# Altium PCB PedalBoxREV2.PcbDoc (part 1 of 2)
Units mm, origin at the board's own origin, x right, y up, seen from the top; angles counter-clockwise.
Board outline 89.6 x 44.45 mm, 2 copper layers (Top Layer, Bottom Layer); 115 components, 87 nets, 418 pads, 92 vias.
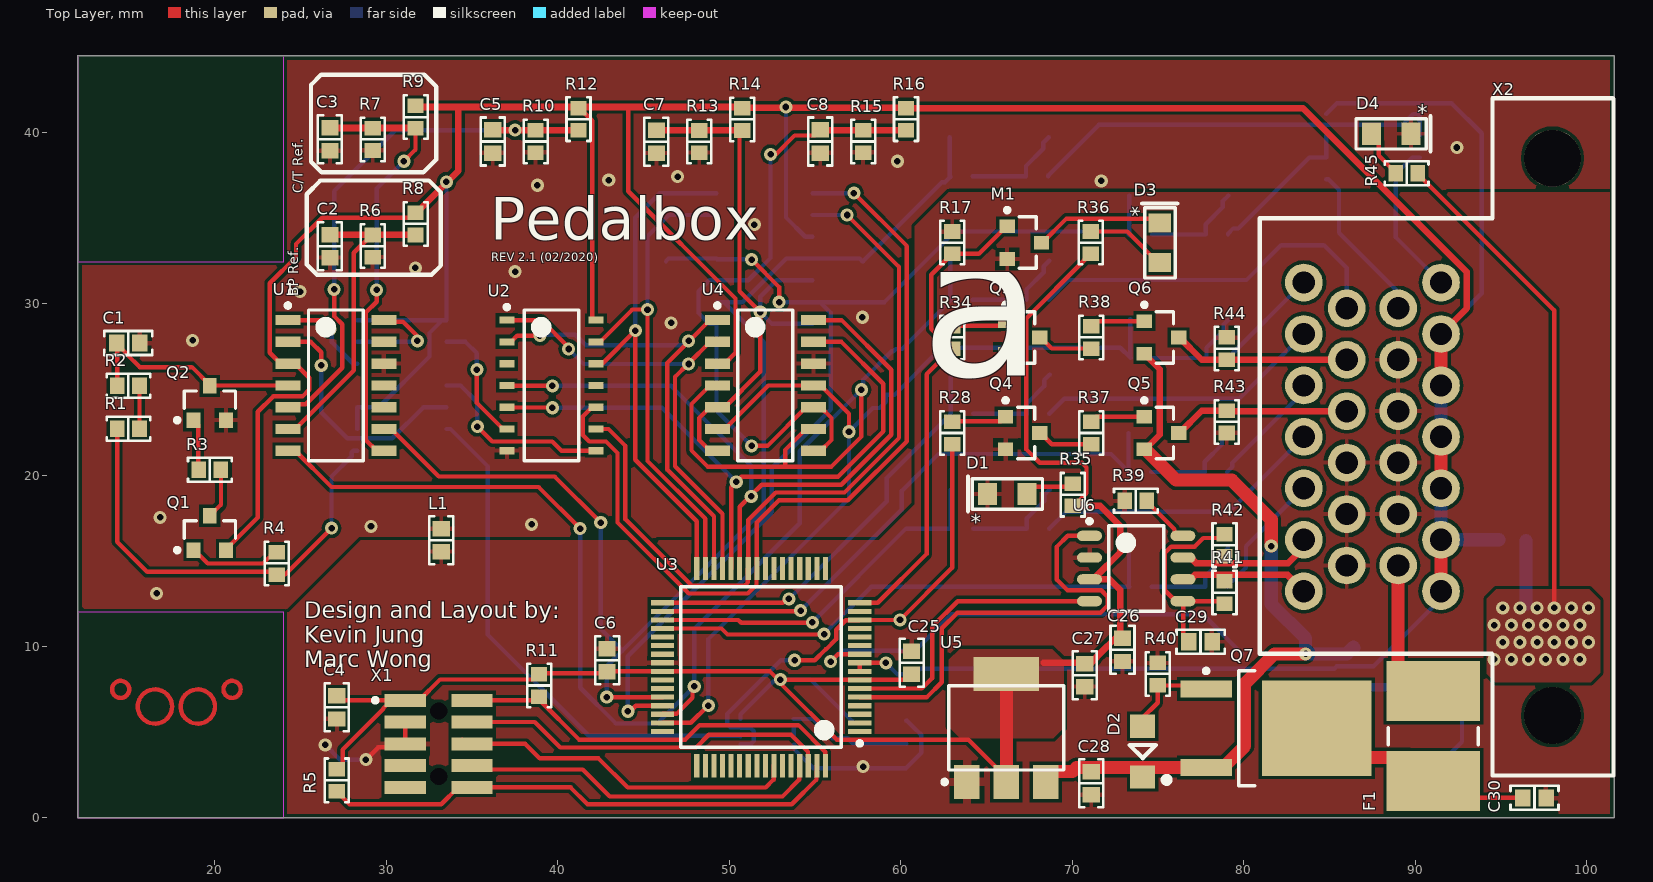
[diagram p0: Top Layer view]
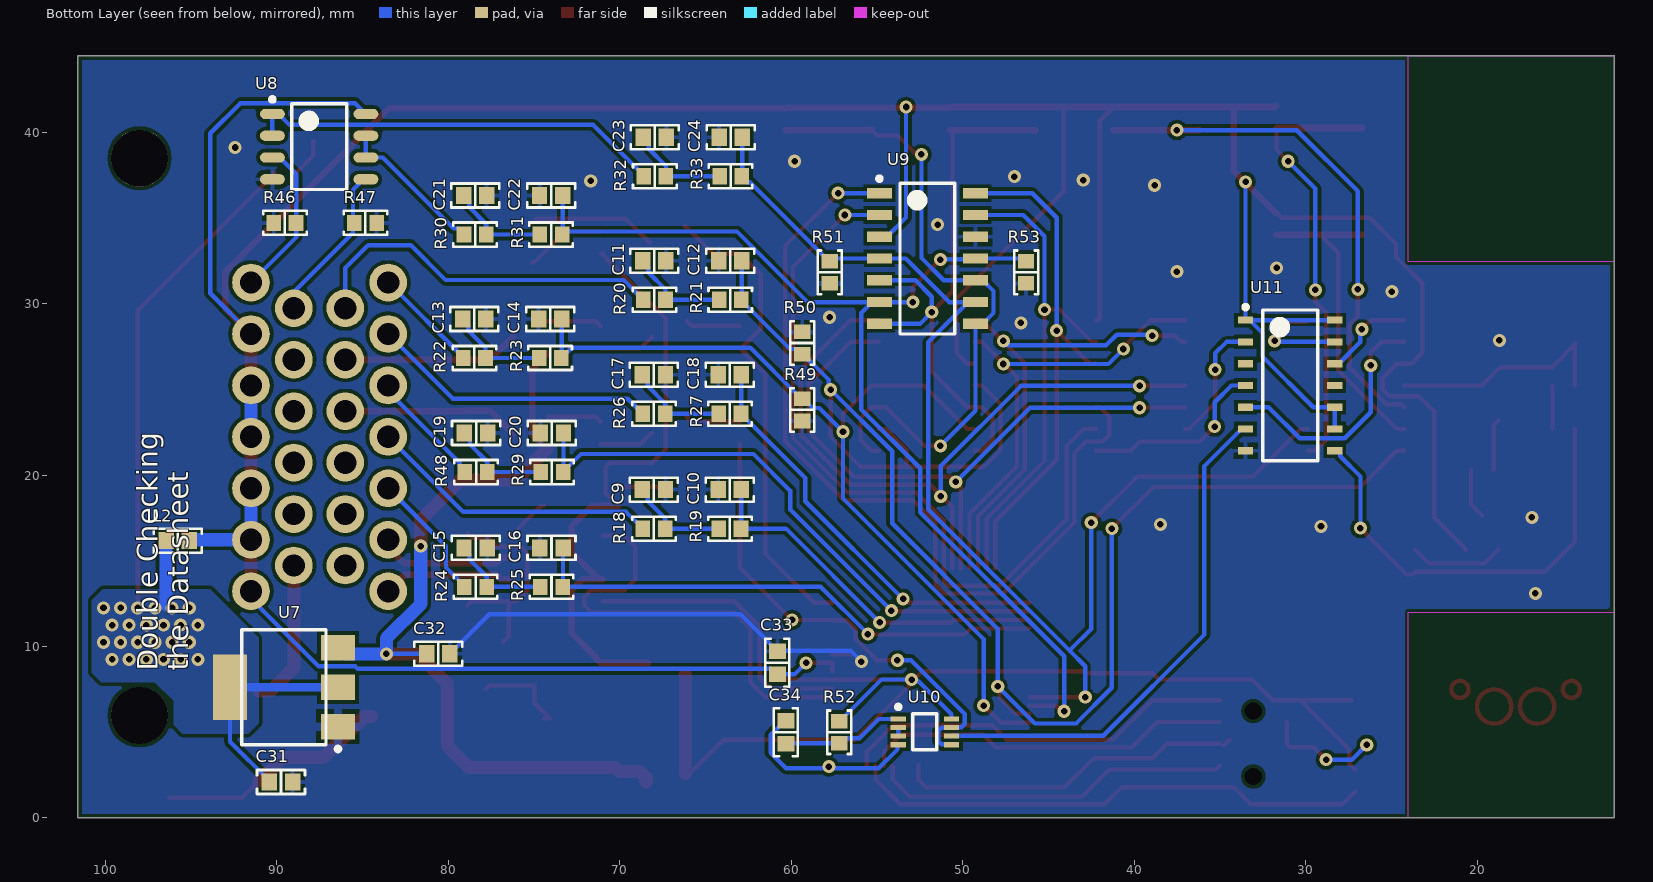
[diagram p1: Bottom Layer view, seen from below]
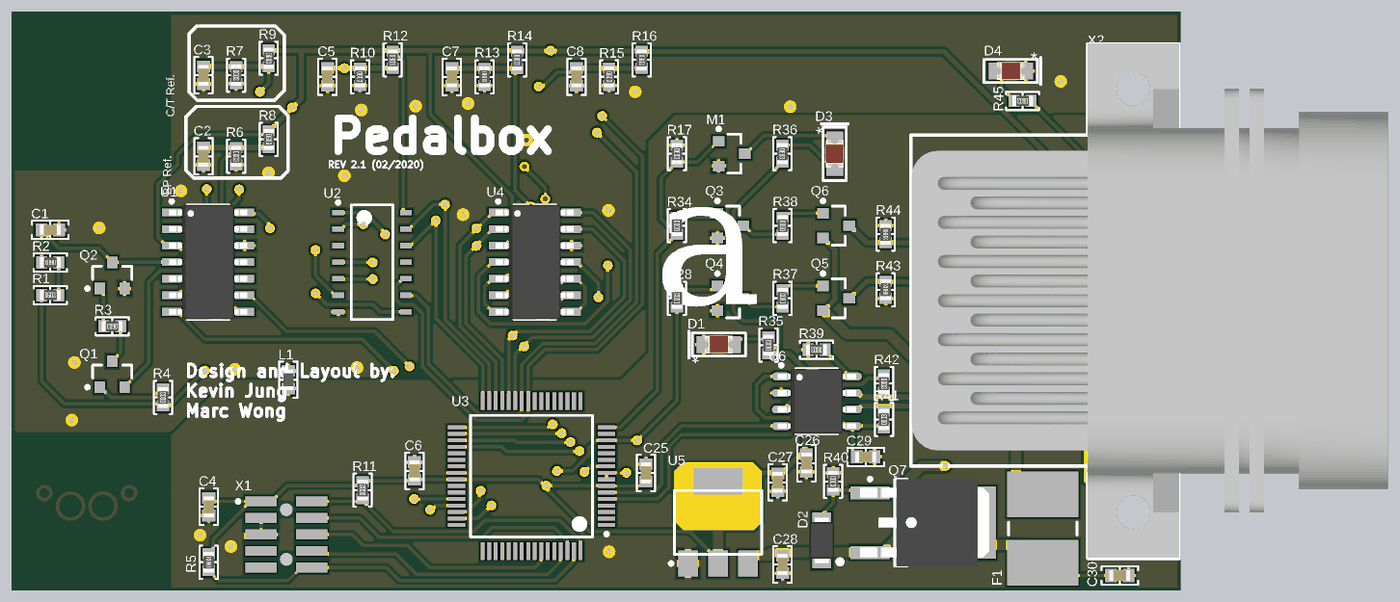
[diagram p2: 3D render of the assembled board from above, using the file's embedded part models]
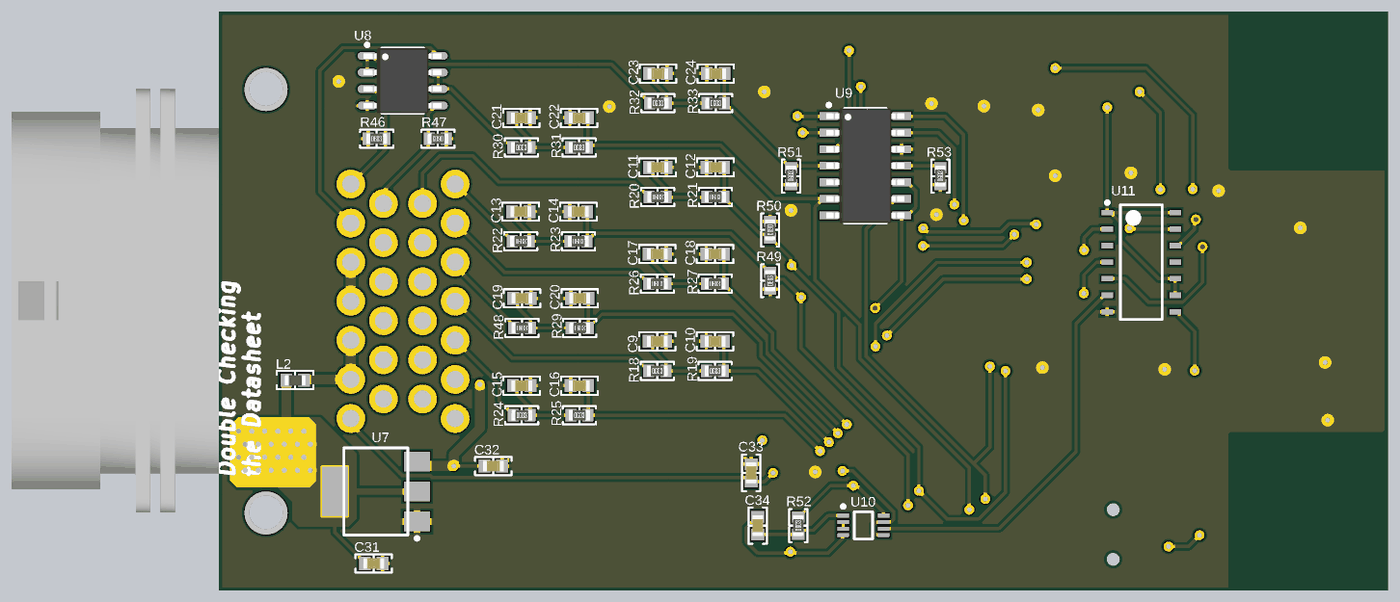
[diagram p3: 3D render of the assembled board from below, using the file's embedded part models]

## Layer stack, top to bottom
Top Solder: solder mask 0.0102, Solder Resist, Dk 3.5
Top Layer: signal copper 0.0356
Dielectric 1: dielectric 0.32, FR-4, Dk 4.8
Bottom Layer: signal copper 0.0356
Bottom Solder: solder mask 0.0102, Solder Resist, Dk 3.5

## Board outline
12,0 12,11.999 12,12 12,44.45 24,44.45 101.601,44.45 101.601,0

## Design rules (kind name [scope] priority, off if disabled: settings)
BoardOutlineClearance [All] p1: gap=0.254 ignorepadtopadclearanceinfootprint=FALSE except(0: Arc-SplitContinuation Track-SplitContinuation SMDPad-SplitContinuation THPad-SplitContinuation Via-SplitContinuation Fill-SplitContinuation Poly-SplitContinuation Region-SplitContinuation Text-SplitContinuation)
Clearance [All] p1: gap=0.203 ignorepadtopadclearanceinfootprint=FALSE except(0.152: SMDPad-SMDPad)
DiffPairsRouting [All] p1: maxlimit=0.254 minlimit=0.254 mostfreqgap=0.254 toplayer_minwidth=0.381 toplayer_maxwidth=0.381 toplayer_prefwidth=0.381 bottomlayer_minwidth=0.381 bottomlayer_maxwidth=0.381 bottomlayer_prefwidth=0.381 maxuncoupledlength=12.7
Height [All] p1: minheight=0 maxheight=38.1 prefheight=12.7
HoleSize [All] p1 off: absolutevalues=TRUE maxlimit=2.54 minlimit=0.025 maxpercent=80.000 minpercent=20.000
MinimumAnnularRing [All] p1: minimumring=0.152
MinimumSolderMaskSliver [All] p1: minsoldermaskwidth=0.1
PlaneConnect [All] p1: pad.planeconnectstyle=Relief pad.reliefexpansion=0.508 pad.reliefentries=4 pad.reliefconductorwidth=0.254 pad.reliefairgap=0.254 via.planeconnectstyle=Direct via.reliefexpansion=0.508 via.reliefentries=4 via.reliefconductorwidth=0.254 via.reliefairgap=0.254
PolygonConnect [All] p1: thpad.connectstyle=Relief thpad.reliefconductorwidth=0.254 thpad.reliefentries=4 thpad.polygonreliefangle="90 Angle" thpad.airgapwidth=0.254 smdpad.connectstyle=Relief smdpad.reliefconductorwidth=0.254 smdpad.reliefentries=4 smdpad.polygonreliefangle="90 Angle" smdpad.airgapwidth=0.254 via.connectstyle=Direct via.reliefconductorwidth=0.254 via.reliefentries=4 via.polygonreliefangle="90 Angle" via.airgapwidth=0.254
RoomDefinition RoomDefinition_4 [InComponentClass('Room Definition 5') vs False] p1: confinementstyle=ConfineIn formatcopy=TRUE lockcomponents=FALSE outline 25.6,31.55 32.8,31.55 32.8,36.35 25.6,36.35
RoomDefinition RoomDefinition_3 [InComponentClass('Room Definition 4') vs False] p2: confinementstyle=ConfineIn formatcopy=TRUE lockcomponents=FALSE outline 35.1,37.65 42.3,37.65 42.3,42.45 35.1,42.45
RoomDefinition RoomDefinition_2 [InComponentClass('Room Definition 3') vs False] p3: confinementstyle=ConfineIn formatcopy=TRUE lockcomponents=FALSE outline 44.7,37.65 51.8,37.65 51.8,42.45 44.7,42.45
RoomDefinition RoomDefinition_1 [InComponentClass('Room Definition 2') vs False] p4: confinementstyle=ConfineIn formatcopy=TRUE lockcomponents=FALSE outline 25.6,37.775 32.8,37.775 32.8,42.575 25.6,42.575
RoomDefinition [InComponentClass('Room Definition 1') vs False] p5: confinementstyle=ConfineIn formatcopy=TRUE lockcomponents=FALSE outline 54.2,37.65 61.4,37.65 61.4,42.45 54.2,42.45
RoomDefinition U_PassiveFilter1 [InComponentClass('U_PassiveFilter1')] p6: confinementstyle=ConfineIn formatcopy=TRUE lockcomponents=FALSE outline 70.425,15.925 61.975,15.925 61.975,20.025 70.425,20.025
RoomDefinition U_PassiveFilter7 [InComponentClass('U_PassiveFilter7')] p7: confinementstyle=ConfineIn formatcopy=TRUE lockcomponents=FALSE outline 80.85,33.075 72.4,33.075 72.4,37.175 80.85,37.175
RoomDefinition U_PassiveFilter5 [InComponentClass('U_PassiveFilter5')] p8: confinementstyle=ConfineIn formatcopy=TRUE lockcomponents=FALSE outline 70.425,22.625 61.975,22.625 61.975,26.725 70.425,26.725
RoomDefinition U_PassiveFilter3 [InComponentClass('U_PassiveFilter3')] p9: confinementstyle=ConfineIn formatcopy=TRUE lockcomponents=FALSE outline 80.9,25.875 72.45,25.875 72.45,29.975 80.9,29.975
RoomDefinition U_PassiveFilter2 [InComponentClass('U_PassiveFilter2')] p10: confinementstyle=ConfineIn formatcopy=TRUE lockcomponents=FALSE outline 70.4,29.275 61.95,29.275 61.95,33.375 70.4,33.375
RoomDefinition U_PassiveFilter8 [InComponentClass('U_PassiveFilter8')] p11: confinementstyle=ConfineIn formatcopy=TRUE lockcomponents=FALSE outline 70.375,36.475 61.925,36.475 61.925,40.575 70.375,40.575
RoomDefinition U_PassiveFilter6 [InComponentClass('U_PassiveFilter6')] p12: confinementstyle=ConfineIn formatcopy=TRUE lockcomponents=FALSE outline 80.8,19.225 72.35,19.225 72.35,23.325 80.8,23.325
RoomDefinition U_PassiveFilter4 [InComponentClass('U_PassiveFilter4')] p13: confinementstyle=ConfineIn formatcopy=TRUE lockcomponents=FALSE outline 80.825,12.525 72.375,12.525 72.375,16.625 80.825,16.625
RoutingVias [All] p1: holewidth=0.381 width=0.762 viastyle="Through Hole" minholewidth=0.381 minwidth=0.762 maxholewidth=0.381 maxwidth=0.762
SilkToSilkClearance [All] p1 off: silktosilkclearance=0.254
SilkToSolderMaskClearance [IsPad] p1 off: minsilkscreentomaskgap=0.254 clearancetoexposedcopper=TRUE
SolderMaskExpansion [All] p1: expansion=0.102 istentingtop=FALSE
UnRoutedNet [All] p1: checkbadconnections=TRUE
Width [All] p1: maxlimit=0.762 minlimit=0.203 preferedwidth=0.254 minimp=50.000000 maximp=50.000000 favimp=50.000000
22 further rules are at their usual default settings.

## Classes and differential pairs
component class AnalogBuffer: R46 R47 U8
component class U_LowLatch: C34 R52 U10
component class U_PassiveFilter2: C11 C12 R20 R21
component class U_PassiveFilter3: C13 C14 R22 R23
component class Pedalbox: D1 F1 L1 L2 R45
channel class SensorCheck: "Brake Pedal Check" "Current/Throttle Check"
channel class PassiveFilter: U_PassiveFilter1 U_PassiveFilter2 U_PassiveFilter3 U_PassiveFilter4 U_PassiveFilter5 U_PassiveFilter6 U_PassiveFilter7 U_PassiveFilter8
channel class 12V_to_5V_LDO_1A: 5V_LDO_Analog 5V_LDO_Digital
component class U_PassiveFilter8: C23 C24 R32 R33
component class U_PassiveFilter7: C21 C22 R30 R31
component class U_PassiveFilter6: C19 C20 R14 R29
component class U_PassiveFilter5: C17 C18 R26 R27
component class U_PassiveFilter4: C15 C16 R24 R25
component class U_PassiveFilter1: C9 C10 R18 R19
component class RVPOVP: C30 D1 Q7 R53
component class MCUPedalbox: C4 C6 C28 C30 D1 M1 R6 R17 R36 R41 U3 X2
component class "Current/Throttle Check": R52 R53 U3
component class CAN_5V: C3 C26 R36 R41 R52 U6
component class BSPD: C1 Q1 Q6 R2 R4 R28 R37 U8
component class "Brake Pedal Check": R7 R50 U6
component class VoltageReferenceGen: C3 C5 C7 C8 C26 R2 R4 R6 R7 R12 R13 R14 R15 R28 R36
component class 26PinSuperseal: X2
component class 5V_LDO_Digital: C8 C28 U3
component class 5V_LDO_Analog: C31 U7
component class 5V_12V_Logic: Q1 Q3 Q6 R6 R28 R37 R38 R44 R45
differential pair CAN: +CAN_P -CAN_N

## Components (designator, comment, footprint, x,y, rotation, side; value= is the part's Value field where it differs from the comment)
C1 "capacitor" 0603 14.95,27.7 r180 top (schematic designator C3)
C2 "capacitor" 0603 26.7,33.35 r90 top (schematic designator C14)
C3 "capacitor" 0603 26.7,39.575 r90 top (schematic designator C16)
C4 "capacitor" 0603 27.1,6.45 r90 top (schematic designator C5)
C5 "capacitor" 0603 36.199,39.45 r90 top (schematic designator C19)
C6 "capacitor" 0603 42.873,9.2 r270 top (schematic designator C4)
C7 "capacitor" 0603 45.742,39.444 r90 top (schematic designator C17)
C8 "capacitor" 0603 55.299,39.45 r90 top (schematic designator C15)
C9 "capacitor" 0603 68,19.15 r0 bottom (schematic designator C12)
C10 "capacitor" 0603 63.575,19.15 r180 bottom (schematic designator C13)
C11 "capacitor" 0603 67.975,32.5 r0 bottom (schematic designator C12)
C12 "capacitor" 0603 63.55,32.5 r180 bottom (schematic designator C13)
C13 "capacitor" 0603 78.475,29.1 r0 bottom (schematic designator C12)
C14 "capacitor" 0603 74.05,29.1 r180 bottom (schematic designator C13)
C15 "capacitor" 0603 78.4,15.75 r0 bottom (schematic designator C12)
C16 "capacitor" 0603 73.975,15.75 r180 bottom (schematic designator C13)
C17 "capacitor" 0603 68,25.85 r0 bottom (schematic designator C12)
C18 "capacitor" 0603 63.575,25.85 r180 bottom (schematic designator C13)
C19 "capacitor" 0603 78.375,22.45 r0 bottom (schematic designator C12)
C20 "capacitor" 0603 73.95,22.45 r180 bottom (schematic designator C13)
C21 "capacitor" 0603 78.425,36.3 r0 bottom (schematic designator C12)
C22 "capacitor" 0603 74,36.3 r180 bottom (schematic designator C13)
C23 "capacitor" 0603 67.95,39.7 r0 bottom (schematic designator C12)
C24 "capacitor" 0603 63.525,39.7 r180 bottom (schematic designator C13)
C25 "capacitor" 0603 60.625,9.05 r270 top (schematic designator C6)
C26 "capacitor" 0603 72.925,9.8 r90 top (schematic designator C10)
C27 "capacitor" 0603 70.725,8.325 r90 top (schematic designator C2)
C28 "capacitor" 0603 71.1,2.025 r90 top (schematic designator C1)
C29 "capacitor" 0603 77.475,10.275 r0 top (schematic designator C11)
C30 "capacitor" 0603 96.95,1.175 r180 top (schematic designator C9)
C31 "capacitor" 0603 89.75,2.1 r0 bottom (schematic designator C2)
C32 "capacitor" 0603 80.575,9.575 r0 bottom (schematic designator C1)
C33 "capacitor" 0603 60.8,9.05 r270 bottom (schematic designator C7)
C34 "capacitor" 0603 60.305,5 r90 bottom (schematic designator C18)
D1 "LED" 0805_LED 66.2,18.9 r180 top (schematic designator D2)
D2 "" SOD123F 74.1,3.875 r270 top (schematic designator D4)
D3 "LED" 0805_LED 75.1,33.55 r90 top (schematic designator D1)
D4 "LED" 0805_LED 88.6,39.9 r0 top (schematic designator D3)
F1 "=I_trip" "PTC Fuse 2920/07351" 91.05,4.775 r270 top
L1 "MPZ1608S221ATA00" 0603 33.2,16.2 r90 top
L2 "MPZ1608S221ATA00" 0603 95.775,16.175 r180 bottom
M1 "" SOT23-3 67.2,33.55 r0 top
Q1 "2SB815-6-TB-E_PNP" SOT23-3 19.7,16.625 r90 top (schematic designator Q5)
Q2 "MMBT4401" SOT23-3 19.7,24.201 r90 top (schematic designator Q6)
Q3 "MMBT4401" SOT23-3 67.1,28.025 r0 top (schematic designator Q4)
Q4 "MMBT4401" SOT23-3 67.102,22.45 r0 top (schematic designator Q3)
Q5 "PNP Transistor" SOT23-3 75.2,22.45 r0 top (schematic designator Q1)
Q6 "PNP Transistor" SOT23-3 75.2,28.025 r0 top (schematic designator Q2)
Q7 "DMP3010LK3-13" DMP3010LK3-13 81.9,5.235 r0 top
R1 "resistor" "RES 0603/1608" 14.95,22.7 r0 top (schematic designator R7)
R2 "resistor" "RES 0603/1608" 14.95,25.2 r180 top (schematic designator R8)
R3 "resistor" "RES 0603/1608" 19.7,20.3 r180 top (schematic designator R10)
R4 "resistor" "RES 0603/1608" 23.6,14.845 r90 top (schematic designator R9)
R5 "resistor" "RES 0603/1608" 27.1,2.2 r90 top (schematic designator R12)
R6 "resistor" "RES 0603/1608" 29.2,33.35 r270 top (schematic designator R27)
R7 "resistor" "RES 0603/1608" 29.2,39.575 r270 top (schematic designator R31)
R8 "resistor" "RES 0603/1608" 31.7,34.65 r270 top (schematic designator R25)
R9 "resistor" "RES 0603/1608" 31.7,40.875 r270 top (schematic designator R29)
R10 "resistor" "RES 0603/1608" 38.699,39.45 r270 top (schematic designator R35)
R11 "resistor" "RES 0603/1608" 38.9,7.725 r90 top
R12 "resistor" "RES 0603/1608" 41.199,40.75 r270 top (schematic designator R34)
R13 "resistor" "RES 0603/1608" 48.242,39.444 r270 top (schematic designator R32)
R14 "resistor" "RES 0603/1608" 50.742,40.744 r270 top (schematic designator R30)
R15 "resistor" "RES 0603/1608" 57.799,39.45 r270 top (schematic designator R28)
R16 "resistor" "RES 0603/1608" 60.299,40.75 r270 top (schematic designator R26)
R17 "resistor" "RES 0603/1608" 63,33.55 r270 top (schematic designator R14)
R18 "resistor" "RES 0603/1608" 68,16.875 r180 bottom (schematic designator R23)
R19 "resistor" "RES 0603/1608" 63.575,16.875 r180 bottom (schematic designator R24)
R20 "resistor" "RES 0603/1608" 67.975,30.225 r180 bottom (schematic designator R23)
R21 "resistor" "RES 0603/1608" 63.55,30.225 r180 bottom (schematic designator R24)
R22 "resistor" "RES 0603/1608" 78.475,26.825 r180 bottom (schematic designator R23)
R23 "resistor" "RES 0603/1608" 74.05,26.825 r180 bottom (schematic designator R24)
R24 "resistor" "RES 0603/1608" 78.4,13.475 r180 bottom (schematic designator R23)
R25 "resistor" "RES 0603/1608" 73.975,13.475 r180 bottom (schematic designator R24)
R26 "resistor" "RES 0603/1608" 68,23.575 r180 bottom (schematic designator R23)
R27 "resistor" "RES 0603/1608" 63.575,23.575 r180 bottom (schematic designator R24)
R28 "resistor" "RES 0603/1608" 63,22.45 r90 top (schematic designator R3)
R29 "resistor" "RES 0603/1608" 73.95,20.175 r180 bottom (schematic designator R24)
R30 "resistor" "RES 0603/1608" 78.425,34.025 r180 bottom (schematic designator R23)
R31 "resistor" "RES 0603/1608" 74,34.025 r180 bottom (schematic designator R24)
R32 "resistor" "RES 0603/1608" 67.95,37.425 r180 bottom (schematic designator R23)
R33 "resistor" "RES 0603/1608" 63.525,37.425 r180 bottom (schematic designator R24)
R34 "resistor" "RES 0603/1608" 63,28.025 r90 top (schematic designator R4)
R35 "resistor" "RES 0603/1608" 70.019,18.85 r90 top (schematic designator R15)
R36 "resistor" "RES 0603/1608" 71.075,33.55 r270 top (schematic designator R13)
R37 "resistor" "RES 0603/1608" 71.1,22.45 r90 top (schematic designator R1)
R38 "resistor" "RES 0603/1608" 71.1,28.025 r90 top (schematic designator R2)
R39 "resistor" "RES 0603/1608" 73.7,18.5 r180 top (schematic designator R22)
R40 "resistor" "RES 0603/1608" 74.975,8.4 r270 top (schematic designator R17)
R41 "62" "RES 0603/1608" 78.873,13.146 r90 top (schematic designator R20)
R42 "resistor" "RES 0603/1608" 78.873,15.908 r270 top (schematic designator R21)
R43 "resistor" "RES 0603/1608" 79,23.1 r90 top (schematic designator R5)
R44 "resistor" "RES 0603/1608" 79,27.375 r270 top (schematic designator R6)
R45 "resistor" "RES 0603/1608" 89.5,37.6 r180 top (schematic designator R16)
R46 "resistor" "RES 0603/1608" 89.525,34.7 r180 bottom (schematic designator R36)
R47 "resistor" "RES 0603/1608" 84.825,34.7 r0 bottom (schematic designator R37)
R48 "resistor" "RES 0603/1608" 78.375,20.175 r180 bottom (schematic designator R23)
R49 "resistor" "RES 0603/1608" 59.35,23.8 r90 bottom (schematic designator R19)
R50 "resistor" "RES 0603/1608" 59.35,27.7 r270 bottom (schematic designator R18)
R51 "resistor" "RES 0603/1608" 57.75,31.825 r90 bottom (schematic designator R18)
R52 "62k" "RES 0603/1608" 57.2,5 r90 bottom (schematic designator R33)
R53 "resistor" "RES 0603/1608" 46.3,31.825 r90 bottom (schematic designator R19)
U1 "TS3704CDT" SOIC-14 27.056,25.225 r0 top (schematic designator U5)
U2 "74HC21D AND Gate" SOT108-1 39.625,25.225 r0 top
U3 "MKE18F512VLH16" TQFP64 51.85,8.8 r180 top (schematic designator U6)
U4 "TS3704CDT" SOIC-14 52.1,25.225 r0 top (schematic designator U8)
U5 "NCP1117ST50T3G" SOT-223-3 66.15,5.25 r90 top (schematic designator U1)
U6 "MCP2561 CAN Transceiver" SOIC-8 73.725,14.55 r0 top (schematic designator U9)
U7 "NCP1117ST50T3G" SOT-223-3 89.575,7.625 r0 bottom (schematic designator U1)
U8 "MCP6002T-I" SOIC-8 87.525,39.15 r180 bottom (schematic designator U7)
U9 "TS3704CDT" SOIC-14 52.05,32.625 r180 bottom (schematic designator U8)
U10 "SN74LVC2G132DCUR" R-PDSO-G8 52.2,5.025 r180 bottom (schematic designator U4)
U11 "" SOT108-1 30.9,25.225 r180 bottom (schematic designator U3)
X1 "CN-2P-M-R10" HDR2X5_SMT 33.05,4.325 r270 top (schematic designator X2)
X2 "" "SUPERSEAL 26POS 90Deg" 98,5.975 r90 top locked (schematic designator X1)

## Footprints (in the part's own frame and the unit in brackets; to place one, negate y for a bottom-side part, rotate by r counter-clockwise, add the part's x,y. Pads: shape width x height; smd on the part's side, far side on the other; paste and mask are expansions set on the pad)
0603 [mm]
  rect 0.9x1 smd: 1(-0.675,0) 2(0.675,0)
  silkscreen extent -1.4,-0.7 1.4,0.7, body extent -0.8,-0.41 0.8,0.41, height 0.82
0805_LED [mm]
  rect 1.1x1.3 smd: 1(-1.15,0) 2(1.15,0)
  silkscreen extent -2.06,-1.02 2.29,1.02, body extent -1.05,-0.67 1.05,0.68, height 0.9
DMP3010LK3-13 [mm] "D-PAK, 3-Pads, Body 6.20x6.71mm (max), IPC Medium Density"
  rect 3x1 smd: 1(-4.1,2.29) 2(-4.1,-2.29)
  rect 6.4x5.55 smd: 3(2.35,0)
  silkscreen extent -4.22,-3.35 -1.25,3.46, body extent -4.86,-3.35 5.04,3.35, height 2.39
HDR2X5_SMT [mm] "Header, 10-Leads, Body 3.43x6.35mm, Pitch 1.27mm"
  rect 0.76x2.4 smd: 1(-2.54,-1.95) 2(-2.54,1.95) 3(-1.27,-1.95) 4(-1.27,1.95) 5(0,-1.95) 6(0,1.95) 7(1.27,-1.95) 8(1.27,1.95) 9(2.54,-1.95) 10(2.54,1.95)
  round 0 hole 1 unplated: MH1(-1.905,0) MH2(1.905,0)
  silkscreen extent -2.66,-3.82 -2.42,-3.57, body extent -3.18,-1.72 3.18,1.72, height 4.55
"PTC Fuse 2920/07351" [mm] "Chip PTC Fuse, 2-Leads, Body 7.36x5.12mm, IPC Medium Density"
  rect 3.5x5.45 smd: 1(-2.625,0) 2(2.625,0)
  silkscreen extent -0.5,-2.62 0.5,2.63, body extent -3.99,-2.72 3.99,2.72, height 1.25
R-PDSO-G8 [mm] "TSSOP, 8-Leads, Body 2.00x2.30mm, Pitch 0.50mm, IPC Medium Density SN74LVC2G132"
  rect 0.9x0.3 smd: 1(-1.55,0.75) 2(-1.55,0.25) 3(-1.55,-0.25) 4(-1.55,-0.75) 5(1.55,-0.75) 6(1.55,-0.25) 7(1.55,0.25) 8(1.55,0.75)
  silkscreen extent -1.68,-1.05 0.7,1.57, body extent -1.1,-1.05 1.1,1.05, height 0.9
"RES 0603/1608" [mm] "Chip Resistor, 2-Leads, Body 1.60x0.80mm, IPC Medium Density"
  rect 0.85x0.95 smd: 1(-0.65,0) 2(0.65,0)
  silkscreen extent -1.27,-0.7 1.27,0.7, body extent -0.8,-0.4 0.8,0.4, height 0.45
SOD123F [mm] "SODFL, 2-Leads, Body 1.80x3.50mm, IPC Low Density"
  rect 1.35x1.45 smd: 1(-1.475,0) 2(1.475,0)
  silkscreen extent -0.38,-0.76 1.75,1.5, body extent -1.75,-0.95 1.75,0.95, height 1.15
SOIC-8 [mm] "SOIC, 8-Leads, Body 4.90x3.90mm, Pitch 1.27mm, IPC Medium Density"
  oval 1.45x0.6 smd: 1(-2.725,1.905) 2(-2.725,0.635) 3(-2.725,-0.635) 4(-2.725,-1.905) 5(2.725,-1.905) 6(2.725,-0.635) 7(2.725,0.635) 8(2.725,1.905)
  silkscreen extent -2.85,-2.5 1.6,2.88, body extent -3,-2.5 3,2.5, height 1.75
SOIC-14 [mm] "SOIC127P600X175-14N, 14-Leads, Body 8.63x3.90mm, Pitch 1.27mm, IPC Medium Density, 74LCX125M"
  rect 1.45x0.6 smd: 1(-2.8,3.81) 2(-2.8,2.54) 3(-2.8,1.27) 4(-2.8,0) 5(-2.8,-1.27) 6(-2.8,-2.54) 7(-2.8,-3.81) 8(2.8,-3.81) 9(2.8,-2.54) 10(2.8,-1.27) 11(2.8,0) 12(2.8,1.27) 13(2.8,2.54) 14(2.8,3.81)
  silkscreen extent -2.92,-4.4 1.6,4.78, body extent -3,-4.4 3,4.4, height 1.75
SOT23-3 [mm] "SOT23, 3-Leads, Body 2.92x2.37mm, Pitch 0.95mm, IPC Medium Density, NUP2105L"
  rect 0.9x0.8 smd: 1(-1,0.95) 2(-1,-0.95) 3(1,0)
  silkscreen extent -1.12,-1.5 0.7,2.02, body extent -0.7,-1.52 0.7,1.52, height 1.11
SOT108-1 [mm]
  rect 0.889x0.42 smd: 1(-2.6,3.81) 2(-2.6,2.54) 3(-2.6,1.27) 4(-2.6,0) 5(-2.6,-1.27) 6(-2.6,-2.54) 7(-2.6,-3.81) 8(2.6,-3.81) 9(2.6,-2.54) 10(2.6,-1.27) 11(2.6,0) 12(2.6,1.27) 13(2.6,2.54) 14(2.6,3.81)
  silkscreen extent -2.72,-4.4 1.6,4.69, body extent -2,-4.4 2,4.4, height 1.75
SOT-223-3 [mm] "SOT223127P600-8N, NCP1117STAT3G, MMBT4403-7-F"
  rect 2x1.5 smd: 1(-3.15,2.3) 2(-3.15,0) 3(-3.15,-2.3)
  rect 2x3.8 smd: THM(3.15,0)
  silkscreen extent -3.27,-3.35 2.45,3.72, body extent -1.85,-3.35 1.85,3.35, height 1.8
"SUPERSEAL 26POS 90Deg" [mm]
  round 2.2 hole 1.3: 1(7.25,14.5) 2(10.25,14.5) 3(13.25,14.5) 4(16.25,14.5) 5(19.25,14.5) 6(22.25,14.5) 7(25.25,14.5) 8(8.75,12) 9(11.75,12) 10(14.75,12) 11(17.75,12) 12(20.75,12) 13(23.75,12) 14(8.75,9) 15(11.75,9) 16(14.75,9) 17(17.75,9) 18(20.75,9) 19(23.75,9) 20(7.25,6.5) 21(10.25,6.5) 22(13.25,6.5) 23(16.25,6.5) 24(19.25,6.5) 25(22.25,6.5) 26(25.25,6.5)
  round 3.3 hole 3.3 unplated: CH(0,0) RH(32.5,0)
  silkscreen extent -3.5,-3.56 36,17.07, body extent -3.45,-19.5 36.05,17, height 27.91
TQFP64 [mm] "TSQFP, 64-Leads, Body 10.00x10.00mm, Pitch 0.50mm, IPC Medium Density, MKE18F512VLH16"
  rect 1.35x0.3 smd: 1(-5.75,3.75) 2(-5.75,3.25) 3(-5.75,2.75) 4(-5.75,2.25) 5(-5.75,1.75) 6(-5.75,1.25) 7(-5.75,0.75) 8(-5.75,0.25) 9(-5.75,-0.25) 10(-5.75,-0.75) 11(-5.75,-1.25) 12(-5.75,-1.75) 13(-5.75,-2.25) 14(-5.75,-2.75) 15(-5.75,-3.25) 16(-5.75,-3.75) 33(5.75,-3.75) 34(5.75,-3.25) 35(5.75,-2.75) 36(5.75,-2.25) 37(5.75,-1.75) 38(5.75,-1.25) 39(5.75,-0.75) 40(5.75,-0.25) 41(5.75,0.25) 42(5.75,0.75) 43(5.75,1.25) 44(5.75,1.75) 45(5.75,2.25) 46(5.75,2.75) 47(5.75,3.25) 48(5.75,3.75)
  rect 0.3x1.35 smd: 17(-3.75,-5.75) 18(-3.25,-5.75) 19(-2.75,-5.75) 20(-2.25,-5.75) 21(-1.75,-5.75) 22(-1.25,-5.75) 23(-0.75,-5.75) 24(-0.25,-5.75) 25(0.25,-5.75) 26(0.75,-5.75) 27(1.25,-5.75) 28(1.75,-5.75) 29(2.25,-5.75) 30(2.75,-5.75) 31(3.25,-5.75) 32(3.75,-5.75) 49(3.75,5.75) 50(3.25,5.75) 51(2.75,5.75) 52(2.25,5.75) 53(1.75,5.75) 54(1.25,5.75) 55(0.75,5.75) 56(0.25,5.75) 57(-0.25,5.75) 58(-0.75,5.75) 59(-1.25,5.75) 60(-1.75,5.75) 61(-2.25,5.75) 62(-2.75,5.75) 63(-3.25,5.75) 64(-3.75,5.75)
  silkscreen extent -5.88,-4.67 4.67,4.68, body extent -5,-5 5,5, height 1.6

## Part data
C1 C27 C28 C31 C32: library part 1, "Generic 0603 capacitor", capacitance=10uF, Dielectric=Ceramic, package=0603, percent tolerance=10, voltage=50, ESR=1, id=1, name="0603 Capacitor", quantity=0
C2 C3 C4 C5 C6 C7 C8 C25 C26 C33: library part 1, "Generic 0603 capacitor", capacitance=0.1uF, Dielectric=Ceramic, package=0603, percent tolerance=10, voltage=50, ESR=1, id=1, name="0603 Capacitor", quantity=0
C9 C10 C11 C12 C13 C14 C15 C16 C17 C18 C19 C20 C21 C22 C23 C24: library part 1, "Generic 0603 capacitor", capacitance=.33uF, Dielectric=Ceramic, package=0603, percent tolerance=10, voltage=50, ESR=1, id=1, name="0603 Capacitor", quantity=0
C29: library part 1, "Generic 0603 capacitor", capacitance=4700pF, Dielectric=Ceramic, package=0603, percent tolerance=10, voltage=50, ESR=1, id=1, name="0603 Capacitor", quantity=0
C30: library part 1, "Generic 0603 capacitor", capacitance=0.01uF, Dielectric=Ceramic, package=0603, percent tolerance=10, voltage=50, ESR=1, id=1, name="0603 Capacitor", quantity=0
C34: library part 1, "Generic 0603 capacitor", capacitance=1uF, Dielectric=Ceramic, package=0603, percent tolerance=10, voltage=50, ESR=1, id=1, name="0603 Capacitor", quantity=0
D1 D3 D4: library part 19, "Generic 0805 LED", package=0805, id=19, name="0805 LED", numcircuits=1, quantity=0, vr=1
D2: library part 10, "Zener Diode 14V 500mW ±5% Surface Mount SOD-1", package=SOD-123, id=10, link=https://www.digikey.com/product-detail/en/diodes-incorporated/DDZ9701-7/DDZ9701-7DICT-ND/3877402, name=DDZ9701, quantity=0
F1: library part 11, "Polymeric PTC Resettable Fuse 24V 2A Ih Surfa", createdby=Kevin, id=11, iinterrupt=0, itrip=4, LatestRevisionDate=17-Jul-2002, LatestRevisionNote="Re-released for DXP Platform.", link=https://www.digikey.com/product-detail/en/bel-fuse-inc/0ZCF0200AF2C/507-1749-1-ND/4156183, name=0ZCF0200AF2C, PackageDescription="Thru-Hole; 2 Leads", PackageReference=PIN-W2/E2.8, Published=8-Jun-2000, Publisher="Altium Limited", quantity=0, vmax=24
L1 L2: library part 10, "220 Ohms @ 100MHz 1 Power Line Ferrite Bead 0", package=0603, resistance=50mOhm, Tolerance=0, createdby=Kevin, Digi-Key_Part_Number=445-1565-1-ND, Digi-Key_Purchase_URL=https://www.digikey.com/product-detail/en/tdk-corporation/MPZ1608S221ATA00/445-1565-1-ND/571895?utm_source=snapeda&utm_medium=aggregator&utm_campaign=symbol, id=10, imax=2.20000004768372, link=https://www.digikey.com/product-detail/en/tdk-corporation/MPZ1608S221ATA00/445-1565-1-ND/571895, MF=TDK, MP=MPZ1608S221ATA00, name=MPZ1608S221ATA00, quantity=0, SnapEDA_Link=https://www.snapeda.com/parts/MPZ1608S221ATA00/TDK-Lambda%20Americas%20Inc/view-part/?ref=snap
M1: library part 6, "MOSFET N-CHANNEL 30V 5A SOT23", current=2.8A, package=SOT-23, id=6, link=https://www.digikey.com/product-detail/en/diodes-incorporated/DMG2302UK-7/DMG2302UK-7DICT-ND/6010163, name=DMG2302UK-7, numcircuits=1, quantity=0, rdson=90mOhm, Type=N_Channel, vdsmax=0, vgsmax=1, vt=800
Q1: library part 8, package="SMT 3-CP", beta=200, Ic=0.699999988079071, id=8, link=https://www.digikey.com/product-detail/en/on-semiconductor/2SB815-6-TB-E/2SB815-6-TB-EOSCT-ND/8538307, name="2SB815-6-TB-E PNP", quantity=0, Type=PNP, vcemax=15
Q2: library part 2, id=2, link=https://www.digikey.com/product-detail/en/on-semiconductor/MMBT4401/MMBT4401FSCT-ND/458974?utm_adgroup=Semiconductor%20Modules&slid=&gclid=Cj0KCQiAuf7fBRD7ARIsACqb8w6hHKWa-dWJhBKA9_nL8g4V_vyaEG2IBNoQt05KILQ9xMZ9NiOMdTcaAtxTEALw_wcB, name=MMBT4401, quantity=0, Type=NPN
Q3 Q4: library part 2, package=SOT23-3, id=2, link=https://www.digikey.com/product-detail/en/diodes-incorporated/MMBT4401-7-F/MMBT4401-FDICT-ND/775867, name=MMBT4401, quantity=0, Type=NPN
Q5 Q6: library part 13, "Bipolar (BJT) Transistor PNP 25V 1.5A 100MHz", package=SOT23-3, Power=625, createdby=Kevin, createddate="10/16/2019 7:23:00 AM", id=13, link=https://www.digikey.com/product-detail/en/micro-commercial-co/MMSS8550-L-TP/MMSS8550-L-TPMSCT-ND/2827205, name=MMSS8550-L-TP, quantity=0, Type=PNP, vcemax=25
Q7: library part 26, "P-Channel MOSFET 30V 17A TO252", current=17A, Manufacturer_id=1, package=TO-252-3, createdby=Kevin, Drawer_id=1, id=26, idFuse=3, link=https://www.digikey.com/product-detail/en/diodes-incorporated/DMP3010LK3-13/DMP3010LK3-13DICT-ND/3076574, name=DMP3010LK3-13, numcircuits=1, quantity=0, rdson=8mOhm, Type=P_Channel, vdsmax=30, vgsmax=20
R1 R5 R11 R17 R40 R43 R44: library part 1, package=0603, percent tolerance=5, resistance=10k, id=1, name="0603 Resistor", quantity=0
R2: library part 1, package=0603, percent tolerance=5, resistance=43k, id=1, name="0603 Resistor", quantity=0
R3 R4 R35 R36 R45: library part 1, package=0603, percent tolerance=5, resistance=1k, id=1, name="0603 Resistor", quantity=0
R6 R7 R8 R9 R41 R52: library part 1, package=0603, percent tolerance=5, id=1, name="0603 Resistor", quantity=0
  R41: resistance=62
  R52: resistance=62k
R10: library part 1, package=0603, percent tolerance=5, resistance=3k, id=1, name="0603 Resistor", quantity=0
R12: library part 1, package=0603, percent tolerance=5, resistance=2k, id=1, name="0603 Resistor", quantity=0
R13 R16: library part 1, package=0603, percent tolerance=5, resistance=18k, id=1, name="0603 Resistor", quantity=0
R14: library part 1, package=0603, percent tolerance=5, resistance=680, id=1, name="0603 Resistor", quantity=0
R15: library part 1, package=0603, percent tolerance=5, resistance=390, id=1, name="0603 Resistor", quantity=0
R18 R19 R20 R21 R22 R23 R24 R25 R26 R27 R29 R30 R31 R32 R33 R48: library part 1, package=0603, percent tolerance=5, resistance=1K, id=1, name="0603 Resistor", quantity=0
R28 R34 R37 R38: library part 1, package=0603, percent tolerance=5, resistance=5k, id=1, name="0603 Resistor", quantity=0
R39: library part 1, package=0603, percent tolerance=5, resistance=100, id=1, name="0603 Resistor", quantity=0
R42: library part 1, package=0603, percent tolerance=5, resistance=62, id=1, name="0603 Resistor", quantity=0
R46 R47 R49 R50 R51 R53: library part 1, package=0603, percent tolerance=5, resistance=100k, id=1, name="0603 Resistor", quantity=0
U1 U4 U9: library part 42, "Quad CMOS Comparators", package=SOIC-14, voltageinmax=12, createdby=Kevin, id=42, link=https://www.digikey.com/product-detail/en/stmicroelectronics/TS3704CDT/497-4063-1-ND/720983, name=TS3704CDT, quantity=0, vcc=18
  U1: AnnotateREF=BSPD_Trig
  U4 U9: AnnotateREF=Sens
U2 U11: library part 15, "74HC21D_AND_Gate", id=15, quantity=0
  U2: DualAND=CTC
  U11: DualAND=Plaus+BSPDAND
U3: library part 1, "32b NXP Microcontroller", package=TQFP64, voltagemax=5.5, voltagemin=2.70000004768372, id=1, name=MKE18F512VLH16, quantity=0
U5 U7: library part 16, "5V linear regulator", package=SOT-223-3, id=16, imax=1, link=https://www.digikey.com/product-detail/en/on-semiconductor/NCP1117ST50T3G/NCP1117ST50T3GOSCT-ND/1967217, name=NCP1117ST50T3G, quantity=0
U6: library part 5, package=SOIC-8, id=5, link=https://www.digikey.com/product-detail/en/microchip-technology/MCP2561T-E-SN/MCP2561T-E-SNCT-ND/5148846, name=null, quantity=0, Type=CAN, vcc=0
U8: library part 2, "Rail-to-Rail 2 Circuit OPAMP 8SOIC", currentoutput=23, voltage=6, voltagelow=1.79999995231628, createdby=Kevin, gbw=0, id=2, link=https://www.digikey.com/product-detail/en/microchip-technology/MCP6002T-I-SN/MCP6002T-I-SNCT-ND/4307905, name=MCP6002T-I, Num_Circuits=2, quantity=0, slewrate=0.600000023841858, voltagehigh=6
U10: library part 12, "SN74LVC2G132DCUR 2channel NAND Gate", id=12, link=https://www.digikey.com/product-detail/en/texas-instruments/SN74LVC2G132DCUR/296-18802-1-ND/863928, name=SN74LVC2G132DCUR, quantity=0, updatedby=Kevin
X1: library part 4, "CONN_TE_2X5POS", id=4, link=https://www.digikey.com/product-detail/en/5103309-1/A33160-ND/1114898?utm_campaign=buynow&WT.z_cid=ref_octopart_dkc_buynow&utm_medium=aggregator&curr=usd&site=us&utm_source=octopart, name=5103309-1, numcontacts=10, numrows=2, Pitch=2.54mm, quantity=0
X2: library part 21, "AMP Superseal 90Deg", id=21, link=https://www.te.com/usa-en/product-6437288-4.html#guest-click, name=6437288-4, numcontacts=26, numrows=4, Pitch=3mm, quantity=0

## Via types
v1: diameter 0.762, hole 0.381, Top Layer to Bottom Layer, 92 vias

## Nets (pads, with @x,y where several pads share a name; then routed paths per layer and width w, separated by ;. In a path a pad name is that pad's centre, name@x,y a point inside that pad or via, vN(x,y) a via of type N, cw(c..) or ccw(c..) an arc to the next point about the centre after c; other vN are vias at no path point)
5Vin: C33.2 L2.2 Q1.2 R8.1 R9.1 R12.1 R14.1 R16.1 U1.3 U2.14 U3.8 U3.9 U4.3 U8.8 U9.3 U11.1 U11.9 U11.10 U11.14 X2.20 X2.21 X2.22 X2.23 X2.24 X2.25 | length 247.6
  Top Layer w0.254: Q1.2 20.65,15.675 22.5,17.525 22.5,23.691 23.394,24.585 25.108,24.585 25.5,24.977 25.5,25.676 24.681,26.495 U1.3 23.831,26.495 23.201,27.125 23.201,31.184 24.73,32.713 24.73,33.473 26.26,35.002 31.402,35.002 R8.1 ; R12.1 41.497,41.102 41.564,41.102 42.004,40.662 42.004,29.118 42.087,29.035 U2.14 ; 44.1,41.463 44.1,36.553 50.355,30.298 50.355,27.125 49.725,26.495 U4.3 ; U3.8 U3.9 v1(59.125,9.05)
  Top Layer w0.381: R8.1 31.75,35.3 34.2,37.75 34.2,41.463 ; R9.1 31.762,41.463 34.2,41.463 ; X2.25 92.994,29.719 92.994,31.844 83.437,41.4 R16.1 60.268,41.431 53.331,41.431 v1(53.3,41.463) 53.266,41.428 50.777,41.428 50.742,41.463 44.1,41.463 34.2,41.463
  Top Layer w0.762: X2.20 X2.21 ; X2.22 X2.23 ; X2.24 X2.25
  Bottom Layer w0.254: U11.9 U11.10 29.555,23.955 32.511,26.911 32.511,28.281 U11.1@33.265,29.035 ; U11.14 U11.1@33.265,29.035 ; v1(33.5,37.1) U11.1 U11.1@33.265,29.035 ; v1(53.3,41.463) 53.3,35.02 54.425,33.895 U9.3 ; v1(59.125,9.05) 59.8,8.375 C33.2 61.123,8.698 85.281,8.698 85.428,8.845 87.562,8.845 91.5,12.783 X2.20 ; U8.8 85.43,41.685 92.115,41.685 93.875,39.925 93.875,30.6 X2.25
  Bottom Layer w0.762: X2.22 X2.21 L2.2@94.875,16.225 ; X2.23 X2.24
"12V Rail": C28.2 C32.2 D2.2 Q5.2 Q6.2 Q7.2 U5.3 U7.3 | length 50
  Top Layer w0.254: Q5.2 Q5.2@74.25,21.5
  Top Layer w0.381: Q6.2 74.25,27.075 74.46,26.865 74.46,26.815 75.1,26.175 75.1,22.35 Q5.2@74.25,21.5
  Top Layer w0.762: U5.3 68.45,2.35 68.819,2.719 70.019,2.719 70.245,2.945 Q7.2 78.8,2.945 80.05,4.195 80.05,7.836 81.789,9.575 v1(83.6,9.575) ; Q5.2@74.25,21.5 76.05,19.7 79.3,19.7 81.6,17.4 v1(81.6,15.85)
  Bottom Layer w0.254: C32.2 v1(83.6,9.575)
  Bottom Layer w0.762: v1(81.6,15.85) 81.6,12.475 83.6,10.475 v1(83.6,9.575) 86,9.575 86.388,9.963 U7.3
12V_Harness: F1.1 X2.14 | length 8.6
  Top Layer w0.762: X2.14 89,8.769 90.369,7.4 F1.1
ACC1_Filtered: C16.2 R25.2 U3.36 | length 30.8
  Top Layer w0.254: U3.36 49.539,11.05 49.89,10.699 55.494,10.699 v1(55.523,10.727)
  Bottom Layer w0.254: v1(55.523,10.727) 58.27,13.475 R25.2 73.3,13.5 C16.2
ACC1_Harness: R24.1 X2.3 | length 7.6
  Bottom Layer w0.254: R24.1 79.05,13.525 80.125,14.6 80.125,15.85 X2.3
ACC2_Filtered: C10.2 R19.2 U3.35 | length 21.5
  Top Layer w0.254: U3.35 50.523,11.55 50.692,11.381 54.811,11.381 v1(54.84,11.41)
  Bottom Layer w0.254: v1(54.84,11.41) 60.305,16.875 R19.2 62.9,16.9 C10.2
ACC2_Harness: R18.1 X2.4 | length 17.1
  Bottom Layer w0.254: R18.1 69.625,17.85 79.125,17.85 X2.4
AGND: C1.1 C2.1 C3.1 C5.1 C7.1 C8.1 C9.1 C10.1 C11.1 C12.1 C13.1 C14.1 C15.1 C16.1 C17.1 C18.1 C19.1 C20.1 C21.1 C22.1 C23.1 C24.1 C31.1 C32.1 C33.1 D4.2 L1.2 Q2.2 R6.2 R7.2 R10.2 R13.2 R15.2 R46.1 R47.1 R49.1 R50.1 R51.1 R53.1 U1.12 U2.7 U3.10 U4.12 U7.1 U8.4 U9.12 U11.7 | length 28
  Top Layer w0.254: v1(55.9,9.12) 56.33,9.55 U3.10
  Bottom Layer w0.254: v1(55.9,9.12) 56.541,9.761 60.764,9.761 C33.1 62.951,11.876 77.599,11.876 C32.1
  other v1: 16.6,13.1 29.1,17 38.472,17.128 16.8,17.525 18.7,27.85 46.6,28.874 57.75,29.2 24.968,30.7 37.5,31.858 31.687,32.083 51.463,34.6 38.8,36.9 71.684,37.158 42.964,37.2 46.978,37.4 59.8,38.3 92.429,39.1
BK1_Filtered: C20.2 R29.2 U3.34 | length 34.3
  Top Layer w0.254: U3.34 46.114,12.064 54.129,12.064 v1(54.158,12.093)
  Bottom Layer w0.254: v1(54.158,12.093) 60.05,17.985 60.05,19.075 62.2,21.225 72.25,21.225 R29.2@73.275,20.2 ; C20.2 R29.2@73.275,20.2 ; R29.2 R29.2@73.275,20.2
BK1_Harness: R48.1 X2.5 | length 6.9
  Bottom Layer w0.254: R48.1 79.323,20.473 79.323,20.698 83.5,24.875 X2.5
BK2_Filtered: C18.2 R27.2 U3.33 | length 24.5
  Top Layer w0.254: U3.33 53.113,12.55 53.338,12.775 v1(53.475,12.775)
  Bottom Layer w0.254: v1(53.475,12.775) 59.175,18.475 59.175,19.825 R27.2 62.9,23.6 C18.2
BK2_Harness: R26.1 X2.6 | length 16.8
  Bottom Layer w0.254: R26.1 69.525,24.45 79.725,24.45 X2.6
BPC_1_0.5: U2.4 U3.27 U4.14 | length 41.7
  Top Layer w0.254: U2.4 37.038,25.212 39.663,25.212 v1(39.675,25.2) ; U3.27 50.6,18.15 51.237,18.788 51.889,19.439 56.521,19.439 59.436,22.354 59.436,26.139 56.54,29.035 U4.14
  Bottom Layer w0.254: v1(39.675,25.2) 46.6,25.2 51.275,20.525 v1(51.275,18.75)
BPC_1_4.5: U2.1 U3.29 U4.2 | length 27.4
  Top Layer w0.254: U2.1 39.046,29.035 40.625,27.456 v1(40.625,27.35) ; U4.2 48.875,27.765 47.605,26.495 46.832,25.722 46.832,20.508 49.6,17.74 U3.29
  Bottom Layer w0.254: v1(40.625,27.35) 41.5,26.475 v1(47.625,26.475)
BPC_2_0.5: U2.5 U3.28 U4.13 | length 38
  Top Layer w0.254: U2.5 37.04,23.94 39.66,23.94 v1(39.675,23.925) ; U3.28 50.1,19.297 v1(50.4,19.597) 50.7,19.897 56.332,19.897 58.978,22.543 58.978,25.327 56.54,27.765 U4.13
  Bottom Layer w0.254: v1(39.675,23.925) 46.072,23.925 v1(50.4,19.597)
BPC_2_4.5: U2.2 U3.30 U4.1 | length 28.2
  Top Layer w0.254: U2.2 37.26,27.765 37.62,28.125 v1(38.95,28.125) ; U3.30 49.1,17.593 46.375,20.318 46.375,26.535 47.645,27.805 48.875,29.035 U4.1
  Bottom Layer w0.254: v1(38.95,28.125) 39.011,28.186 41.014,28.186 41.636,27.564 47.364,27.564 v1(47.625,27.825)
BPC_AND_OUT: U2.6 U11.2 | length 7.3
  Top Layer w0.254: v1(35.275,26.15) 35.275,24.201 36.791,22.685 U2.6
  Bottom Layer w0.254: U11.2 34.61,27.765 35.275,27.1 v1(35.275,26.15)
BPF_Filtered: C12.2 R21.2 R50.2 U1.7 U3.46 U4.4 U4.9 | length 92.4
  Top Layer w0.254: U1.7 24.681,21.415 26.796,19.3 38.875,19.3 v1(41.3,16.875) ; U3.46 46.12,6.07 46.912,6.07 47.853,7.011 47.853,7.578 v1(47.95,7.675) ; U4.4 48.875,25.225 47.788,24.138 47.788,21.435 48.748,20.475 53.25,20.475 ; U4.9 54.475,22.685 53.25,21.46 53.25,20.475 ; v1(57.7,24.975) 57.7,22.244 55.931,20.475 53.25,20.475
  Bottom Layer w0.254: v1(41.3,16.875) 41.3,7.594 43.38,5.514 45.789,5.514 v1(47.95,7.675) 47.95,11.028 54.107,17.186 54.107,21.382 57.797,25.072 57.797,25.547 59.463,27.213 59.563,27.213 59.698,27.348 60.073,27.348 62.9,30.175 R21.2 62.875,30.25 C12.2
BPF_Harness: R20.1 X2.13 | length 21.6
  Bottom Layer w0.254: R20.1 69.775,31.375 80.15,31.375 82.175,33.4 84.671,33.4 86,32.071 X2.13
BPR_Filtered: C14.2 R23.2 R49.2 U3.47 U4.6 U4.11 | length 54.1
  Top Layer w0.254: U3.47 47.753,5.55 48.753,6.55 v1(48.775,6.55) ; U4.6 49.725,22.685 52.265,25.225 U4.11 55.325,25.225 56.975,23.575 v1(56.975,22.525)
  Bottom Layer w0.254: v1(48.775,6.55) 48.775,10.438 56.975,18.638 v1(56.975,22.525) 58.355,23.905 58.755,23.905 59.125,24.275 59.125,24.675 59.625,24.675 62.375,27.425 72.8,27.425 R23.2@73.375,26.85 ; C14.2 R23.2@73.375,26.85 ; R23.2 R23.2@73.375,26.85
BPR_Harness: R22.1 X2.7 | length 6.2
  Bottom Layer w0.254: R22.1 79.125,26.875 83.475,31.225 X2.7
"Brake Pressure REF": C2.2 R6.1 R8.2 U1.6 | length 18.7
  Top Layer w0.254: U1.6 24.681,22.685 28.1,26.104 28.1,32.967 28.588,33.455 28.605,33.455 29.15,34 R6.1
  Top Layer w0.381: C2.2 26.712,34.012 31.687,34.012 R8.2
"Brakelight 5V": M1.1 R17.2 R34.1 U3.16 | length 28.1
  Top Layer w0.254: U3.16 58.656,12.55 61.5,15.394 61.5,25.875 62.652,27.027 62.652,27.077 62.95,27.375 62.405,27.92 62.388,27.92 61.775,28.533 61.775,31.675 62.652,32.552 62.652,32.602 62.95,32.9 R17.2 64.55,32.9 66.15,34.5 M1.1
"Brakelight 12V": Q6.3 R44.2 X2.12 | length 10.3
  Top Layer w0.381: Q6.3 76.25,28.025 77.55,26.725 R44.2 X2.12
"BSPD 5V": R28.1 U3.14 U10.5 U10.7 | length 27.9
  Top Layer w0.254: v1(53.8,9.2) 54.974,9.2 55.605,9.831 55.632,9.831 56.234,10.433 56.234,10.976 56.788,11.53 57.58,11.53 U3.14 v1(59.95,11.55) 63,14.6 R28.1
  Bottom Layer w0.254: U10.5 50.67,4.295 51.237,4.295 51.43,4.488 51.43,5.062 51.237,5.255 50.67,5.255 50.63,5.295 50.063,5.295 49.87,5.488 49.87,6.062 53.008,9.2 v1(53.8,9.2)
"BSPD 12V": Q5.3 R43.2 X2.11 | length 10.3
  Top Layer w0.381: Q5.3 76.25,22.45 77.55,23.75 R43.2 79.019,23.731 85.994,23.731 X2.11
BSPD_NoLatch: U10.6 U11.6 | length 30.3
  Bottom Layer w0.254: U11.6 33.734,22.685 35.9,20.52 35.9,10.7 41.805,4.795 50.63,4.795 U10.6
CAN_N: R41.2 U6.6 X2.1 | length 7.6
  Top Layer w0.381: U6.6 76.89,13.915 77.15,14.175 82.55,14.175 X2.1
CAN_P: R42.2 U6.7 X2.2 | length 8
  Top Layer w0.381: U6.7 76.89,15.185 77.208,14.867 82.592,14.867 83.5,15.775 X2.2
CT1_Buffered: R32.1 U8.1 U8.2 | length 24.5
  Bottom Layer w0.254: R32.1 68.6,37.475 71.545,40.42 89.245,40.42 89.88,41.055 U8.1 U8.2
CT1_Filtered: C24.2 R33.2 R51.2 U1.9 U3.44 U9.4 U9.9 | length 73
  Top Layer w0.254: U1.9 30.281,22.685 33.049,19.917 39.808,19.917 v1(42.5,17.225) ; v1(42.85,7.05) U3.44
  Bottom Layer w0.254: v1(42.5,17.225) 42.5,11.021 43.76,9.76 ; v1(42.85,7.05) 42.85,8.85 43.76,9.76 ; U9.9 U9.9@49.675,30.085 ; C24.2 62.85,37.45 R33.2 62.875,37.375 62.577,37.077 62.402,37.077 57.8,32.475 R51.2 57.6,32.625 U9.4 53.32,32.625 50.78,30.085 U9.9@49.675,30.085 ; 43.76,9.76 52.011,18.011 52.011,27.749 U9.9@49.675,30.085
CT1_Harness: R46.2 U8.3 X2.26 | length 9.2
  Bottom Layer w0.254: U8.3 89.825,38.515 88.85,37.54 88.85,35.075 88.85,34.625 88.85,33.875 X2.26
CT2_Buffered: R30.1 U8.6 U8.7 | length 8.9
  Bottom Layer w0.254: R30.1 79.075,34.075 79.373,34.373 79.673,34.373 83.815,38.515 U8.6 U8.7
CT2_Filtered: C22.2 R31.2 R53.2 U3.45 U9.6 U9.11 | length 64
  Top Layer w0.254: v1(44.075,6.225) 44.212,6.225 44.537,6.55 U3.45 ; v1(51.3,32.562) 52.9,30.962 v1(52.9,30.085)
  Bottom Layer w0.254: v1(44.075,6.225) 44.075,9.428 52.468,17.822 52.468,20.39 55.905,23.827 55.905,29.455 U9.6@55.275,30.085 ; R53.2 46.45,32.625 U9.11 49.281,32.594 51.269,32.594 v1(51.3,32.562) ; v1(52.9,30.085) U9.6 U9.6@55.275,30.085 ; C22.2 73.325,34.05 R31.2 73.35,33.975 73.125,34.2 63.158,34.2 59.043,30.085 U9.6@55.275,30.085
CT2_Harness: R47.2 U8.5 X2.19 | length 9.3
  Bottom Layer w0.254: U8.5 84.938,37.245 85.55,36.633 85.55,35.025 85.55,34.625 85.55,34.125 89,30.675 X2.19
CTC_1_0.5: U2.12 U3.32 U9.14 | length 30.4
  Top Layer w0.254: U2.12 42.584,26.495 v1(44.514,28.425) 44.514,20.886 48.1,17.3 U3.32
  Bottom Layer w0.254: v1(44.514,28.425) 44.514,35.01 45.939,36.435 U9.14
CTC_1_4.5: U2.9 U3.26 U9.2 | length 45.9
  Top Layer w0.254: U2.9 42.95,22.685 43.936,21.699 43.936,17.422 47.813,13.545 50.887,13.545 51.08,13.738 51.08,14.53 U3.26 51.1,17.377 52.705,18.982 56.711,18.982 59.893,22.164 59.893,32.137 v1(56.865,35.165)
  Bottom Layer w0.254: U9.2 v1(56.865,35.165)
CTC_2_0.5: U2.13 U3.31 U9.13 | length 29.1
  Top Layer w0.254: U2.13 42.46,27.765 44.345,29.65 v1(45.225,29.65) 45.225,20.822 48.6,17.447 U3.31
  Bottom Layer w0.254: v1(45.225,29.65) 45.225,33.925 46.465,35.165 U9.13
CTC_2_4.5: U2.10 U3.25 U9.1 | length 51.1
  Top Layer w0.254: U2.10 41.991,23.955 41.45,23.415 41.45,22.338 41.833,21.955 42.806,21.955 43.478,21.283 43.478,17.233 47.624,13.088 51.076,13.088 51.58,13.592 51.58,14.53 U3.25 51.6,17.231 52.894,18.525 56.9,18.525 60.35,21.975 60.35,33.35 v1(57.265,36.435)
  Bottom Layer w0.254: U9.1 v1(57.265,36.435)
CTC_AND_OUT: U2.8 U11.4 | length 11.1
  Top Layer w0.254: v1(35.3,22.825) 36.17,21.955 39.67,21.955 40.21,21.415 U2.8
  Bottom Layer w0.254: U11.4 34.325,25.225 35.3,24.251 v1(35.3,22.825)
"Current/Throttle REF": C3.2 R7.1 R9.2 U1.8 | length 25.7
  Top Layer w0.254: v1(29.431,30.8) 29.431,30.102 28.801,29.472 28.801,22.045 29.431,21.415 U1.8 ; v1(31.021,38.3) 31.7,38.978 R9.2
  Top Layer w0.381: C3.2 26.712,40.237 31.687,40.237 R9.2
  Bottom Layer w0.254: v1(29.431,30.8) 29.431,36.71 v1(31.021,38.3)
DGND: C4.1 C6.1 C25.1 C26.1 C27.1 C28.1 C29.2 C30.1 C34.2 D1.2 L1.1 M1.2 Q3.2 Q4.2 R17.1 R39.2 R40.1 R43.1 R44.1 U3.40 U5.1 U6.2 U10.4 X1.3 X1.5 X2.8 X2.9 X2.10 X2.15 X2.16 X2.17 X2.18 | length 17.5
  Top Layer w0.254: v1(28.8,3.4) 29.519,4.119 30.894,4.119 X1.5 X1.3
  Bottom Layer w0.254: v1(26.432,4.268) 27.3,3.4 v1(28.8,3.4) ; U10.4 53.777,4.275 53.8,4.252 53.8,4 54.9,2.9 60.297,2.9 61.195,3.798 61.195,4.852 60.942,5.105 60.925,5.105 60.355,5.675 C34.2
  other v1: 57.8,3
"Hi V REF_Brake Pedal Check": C7.2 R13.1 R14.2 U4.5 U4.7 U9.5 U9.7 | length 34.6
  Top Layer w0.254: U4.7 48.875,21.415 48.245,22.045 48.245,23.325 48.875,23.955 49.725,23.955 51.8,26.03 v1(51.8,29.5) 50.589,30.711 50.589,39.94 R14.2
  Top Layer w0.381: C7.2 45.755,40.106 50.73,40.106 R14.2
  Bottom Layer w0.254: U9.7 52.485,28.815 v1(51.8,29.5) 51.8,30.4 52.755,31.355 U9.5
JTAG_RST: R5.1 U3.63 X1.10 | length 30.5
  Top Layer w0.254: R5.1 27.85,0.8 33.195,0.8 34.18,1.785 X1.10 40.74,1.785 41.725,0.8 53.642,0.8 55.08,2.238 55.08,3.03 U3.63
JTAG_TCLK: U3.62 X1.4 | length 21.7
  Top Layer w0.254: X1.4 38.655,5.595 40.137,4.113 48.063,4.113 48.8,4.85 53.592,4.85 54.58,3.862 54.58,3.07 U3.62
JTAG_TDI: U3.61 X1.8 | length 21.1
  Top Layer w0.254: X1.8 35.23,2.825 41.45,2.825 43.018,1.257 53.099,1.257 54.08,2.238 54.08,3.03 U3.61
JTAG_TDO: U3.58 X1.6 | length 20.2
  Top Layer w0.254: X1.6@34.425,4.578 X1.6@34.774,4.229 ; X1.6 38.088,4.325 38.938,3.475 42.368,3.475 44.068,1.775 52.117,1.775 52.58,2.238 52.58,3.03 U3.58 U3.58@52.58,3.07
JTAG_TMS: R11.1 U3.64 X1.2 | length 23.3
  Top Layer w0.254: X1.2 37.575,6.865 38.935,6.865 41.23,4.57 47.42,4.57 48.267,5.417 54.025,5.417 55.58,3.862 55.58,3.07 U3.64
LDO_OUT_5V_LDO_Analog: C31.2 L2.1 R45.1 U7.2 U7.THM | length 45.2
  Top Layer w0.254: R45.1@90.138,37.662 90.138,37.562 98.1,29.6 v1(98.1,12.25)
  Bottom Layer w0.254: C31.2 90.425,2.15 92.725,4.45 U7.THM
  Bottom Layer w0.508: U7.2 U7.THM
  Bottom Layer w0.762: 96.45,12.45 L2.1
  other v1: 94.6,9.25 95.6,9.25 96.6,9.25 97.6,9.25 98.6,9.25 99.6,9.25 95.1,10.25 96.1,10.25 97.1,10.25 98.1,10.25 99.1,10.25 100.1,10.25 94.6,11.25 95.6,11.25 96.6,11.25 97.6,11.25 98.6,11.25 99.6,11.25 95.1,12.25 96.1,12.25 97.1,12.25 99.1,12.25 100.1,12.25
LDO_OUT_5V_LDO_Digital: C4.2 C6.2 C25.2 C26.2 C27.2 R5.2 R11.2 R35.1 R36.2 R52.2 U3.7 U3.41 U5.2 U5.THM U6.3 U10.8 X1.1 | length 105
  Top Layer w0.254: R5.2 27.15,2.85 27.448,3.148 27.448,3.99 29.832,6.374 29.832,6.417 X1.1@30.28,6.865 ; C4.2@27.34,6.865 X1.1@30.28,6.865 ; v1(52.975,8.075) 52.847,8.075 52.372,8.55 U3.41 42.975,8.55 42.875,8.45 38.925,8.45 38.552,8.077 33.132,8.077 31.92,6.865 X1.1 X1.1@30.28,6.865 ; v1@52.988,8.062 57.548,8.062 U3.7@57.56,8.05 ; v1@53.072,7.755 56.257,4.57 63.93,4.57 65.894,2.606 U5.2@66.15,2.606 ; U3.7 57.602,8.052 C25.2@60.425,8.052 ; R35.1@70.069,18.2 70.614,18.745 70.631,18.745 70.824,18.938 70.824,20.454 70.566,20.712 68.095,20.712 67.32,21.488 67.32,29.145 70.727,32.552 70.727,32.602 71.025,32.9 R36.2
  Top Layer w0.381: 68.327,9.05 71.075,9.05 71.125,9.05 71.385,9.31 71.385,9.36 72.8,10.775 72.8,13.3 72.185,13.915 U6.3@71.425,13.915 ; R35.1@70.069,18.2 71.623,18.2 72.8,17.023 72.8,15.5 71.32,14.02 71.215,13.915 U6.3
  Top Layer w0.762: U5.2@66.15,2.606 66.15,8.35 U5.THM@66.175,8.375
  Bottom Layer w0.254: U10.8 50.65,6.05 52.578,7.978 52.878,7.978 v1(52.975,8.075) 54.725,8.075 57.15,5.65 R52.2
"Lo V REF_Brake Pedal Check": C8.2 R15.1 R16.2 U4.8 U4.10 U9.8 U9.10 | length 38.6
  Top Layer w0.254: v1(51.3,21.7) 52.22,21.7 54.475,23.955 55.325,23.955 55.955,23.325 55.955,22.045 55.325,21.415 U4.8 ; v1(52.4,38.7) 52.7,38.7 53.802,39.802 54.976,39.802 C8.2
  Top Layer w0.381: C8.2 55.311,40.113 57.786,40.113 R15.1 R16.2
  Bottom Layer w0.254: v1(51.3,21.7) 49.25,23.75 U9.8 48.825,28.815 48.195,29.445 48.195,30.725 48.825,31.355 U9.10 51.098,31.355 52.4,32.657 v1(52.4,38.7)
NetC1_2: C1.2 Q2.3 R2.2 U1.4 | length 13.5
  Top Layer w0.254: C1.2 14.275,27.65 C1.2@14.3,27.625 ; R2.2 C1.2@14.3,27.625 ; U1.4 19.724,25.225 Q2.3 19.7,25.251 18.657,26.293 15.615,26.293 14.845,27.063 14.845,27.08 C1.2@14.3,27.625
NetC9_2: C9.2 R18.2 R19.1 | length 5.9
  Bottom Layer w0.254: R19.1 R18.2 67.35,17.475 68.352,18.477 68.352,18.827 C9.2
NetC11_2: C11.2 R20.2 R21.1 | length 5.9
  Bottom Layer w0.254: R21.1 R20.2 67.325,30.825 68.327,31.827 68.327,32.177 C11.2
NetC13_2: C13.2 R22.2 R23.1 | length 5.9
  Bottom Layer w0.254: R23.1 R22.2 77.825,27.425 78.827,28.427 78.827,28.777 C13.2
NetC15_2: C15.2 R24.2 R25.1 | length 5.9
  Bottom Layer w0.254: R25.1 R24.2 77.75,14.075 78.752,15.077 78.752,15.427 C15.2
NetC17_2: C17.2 R26.2 R27.1 | length 5.9
  Bottom Layer w0.254: R27.1 R26.2 67.35,24.175 68.352,25.177 68.352,25.527 C17.2
NetC19_2: C19.2 R29.1 R48.2 | length 5.9
  Bottom Layer w0.254: R29.1 R48.2 77.725,20.775 78.727,21.777 78.727,22.127 C19.2
NetC21_2: C21.2 R30.2 R31.1 | length 5.9
  Bottom Layer w0.254: R31.1 R30.2 77.775,34.625 78.777,35.627 78.777,35.977 C21.2
NetC23_2: C23.2 R32.2 R33.1 | length 5.9
  Bottom Layer w0.254: R33.1 R32.2 67.3,38.025 68.302,39.027 68.302,39.377 C23.2
NetC35_1: C34.1 R52.1 U10.1 | length 7.2
  Bottom Layer w0.254: U10.1 54.889,5.775 56.016,4.648 56.902,4.648 R52.1 60.28,4.35 C34.1
NetD1_1: D3.1 R36.1 | length 4.8
  Top Layer w0.254: R36.1 73.2,34.2 75,32.4 D3.1
NetD1_2: D3.2 M1.3 | length 7.6
  Top Layer w0.254: M1.3 68.25,33.55 69.655,34.955 74.845,34.955 D3.2
NetD2_1: D1.1 R35.2 | length 2.9
  Top Layer w0.254: D1.1 67.773,19.323 69.842,19.323 R35.2
NetD3_1: D4.1 R45.2 | length 2.2
  Top Layer w0.254: D4.1@87.873,39.477 87.873,38.627 R45.2@88.85,37.65
NetD4_1: D2.1 Q7.1 R40.2 | length 5.6
  Top Layer w0.254: D2.1@74.425,5.8 74.05,5.8 74.975,6.725 74.975,7.725 77.6,7.725 Q7.1
NetQ1_1: Q5.1 R37.2 | length 3.2
  Top Layer w0.254: R37.2 71.398,23.398 73.367,23.398 73.369,23.4 Q5.1
NetQ2_1: Q6.1 R38.2 | length 3.2
  Top Layer w0.254: R38.2 71.398,28.973 73.367,28.973 73.369,28.975 Q6.1
NetQ3_1: Q4.1 R28.2 | length 3.2
  Top Layer w0.254: R28.2 63.027,23.127 65.829,23.127 Q4.1
NetQ3_3: Q4.3 R37.1 | length 3.3
  Top Layer w0.254: Q4.3 68.152,22.45 68.802,21.8 R37.1
NetQ4_1: Q3.1 R34.2 | length 3.2
  Top Layer w0.254: R34.2 63.027,28.702 65.827,28.702 Q3.1
NetQ4_3: Q3.3 R38.1 | length 3.3
  Top Layer w0.254: Q3.3 68.15,28.025 68.8,27.375 R38.1
NetQ5_1: Q1.1 R4.2 | length 5.6
  Top Layer w0.254: Q1.1 18.75,15.675 19.58,14.845 22.795,14.845 R4.2@23.6,15.65
NetQ5_3: Q1.3 R3.1 | length 2.9
  Top Layer w0.254: Q1.3 20.35,18.275 R3.1
NetQ6_1: Q2.1 R3.2 | length 3
  Top Layer w0.254: Q2.1 19.023,22.927 19.023,20.327 R3.2
NetR7_2: R1.2 R2.1 | length 2.5
  Top Layer w0.254: R1.2 R2.1
NetU2_12: U1.1 U11.12 | length 5.5
  Top Layer w0.254: U1.1 26.177,29.035 v1(26.712,28.5)
  Bottom Layer w0.254: v1(26.712,28.5) 26.809,28.403 26.809,27.751 28.065,26.495 U11.12
NetU2_13: U1.14 U11.13 | length 6.2
  Top Layer w0.254: U1.14 29.948,28.943 30.962,28.943 31.835,28.07 31.835,27.86 v1(31.8,27.825)
  Bottom Layer w0.254: U11.13 31.74,27.765 v1(31.8,27.825)
NetU10_2: U10.2 U10.3 | length 0.5
  Bottom Layer w0.254: U10.3 U10.2
Plaus_OUT: R1.1 R4.1 U11.8 | length 26.3
  Top Layer w0.254: R1.1 14.3,16.1 16.05,14.35 23.6,14.35 23.75,14.2 24.1,14.2 v1(26.8,16.9)
  Bottom Layer w0.254: v1(26.8,16.9) 26.8,19.915 27.982,21.098 27.982,21.332 28.065,21.415 U11.8
RVPOVP_In: C30.2 F1.2 Q7.3 | length 13.8
  Top Layer w0.254: F1.2 92.025,1.175 C30.2
  Top Layer w0.762: Q7.3@84.475,5.915 84.9,5.915 87.296,3.519 89.681,3.519 F1.2
RX_CAN: U3.6 U6.4 | length 17.3
  Top Layer w0.254: U3.6 61.227,7.55 61.837,8.16 61.837,11.16 63.321,12.645 U6.4
SPLIT: C29.1 R41.1 R42.1 U6.5 | length 12.5
  Top Layer w0.254: C29.1 76.477,10.598 76.477,12.618 U6.5 ; R41.1@78.875,12.4 78.63,12.645 U6.5 ; R42.1@78.875,16.625 78.577,16.327 77.638,16.327 77.136,15.825 75.774,15.825 75.395,15.446 75.395,13.275 76.025,12.645 U6.5
STBY: R39.1 U6.8 | length 2.9
  Top Layer w0.254: R39.1@74.425,18.225 74.575,18.225 75.959,16.841 75.959,16.615 76.119,16.455 U6.8
Timer_OUT: U1.2 U11.5 | length 14.4
  Top Layer w0.254: U1.2 25.591,27.765 26.194,27.162 26.194,26.406 v1(26.2,26.4)
  Bottom Layer w0.254: v1(26.2,26.4) 26.2,23.664 27.719,22.145 30.345,22.145 32.155,23.955 U11.5
Timer_REF: C5.2 R10.1 R12.2 U1.5 | length 31.6
  Top Layer w0.254: U1.5 24.429,24.128 25.298,24.128 27.423,26.254 27.423,28.795 26.95,29.268 v1(26.95,30.828)
  Top Layer w0.381: C5.2 36.212,40.113 v1(37.5,40.113) 41.187,40.113 R12.2
  Bottom Layer w0.254: v1(26.95,30.828) 26.95,36.55 30.512,40.113 v1(37.5,40.113)
TX_CAN: U3.5 U6.1 | length 26.5
  Top Layer w0.254: U3.5 61.517,7.05 62.388,7.921 62.388,11.065 63.295,11.972 71.643,11.972 72.055,12.384 72.055,12.906 71.681,13.28 69.72,13.28 69.1,13.9 69.1,15.825 69.73,16.455 U6.1
pads on no net: U1.10 U1.11 U1.13 U2.3 U2.11 U3.1 U3.2 U3.3 U3.4 U3.11 U3.12 U3.13 U3.15 U3.17 U3.18 U3.19 U3.20 U3.21 U3.22 U3.23 U3.24 U3.37 U3.38 U3.39 U3.42 U3.43 U3.48 U3.49 U3.50 U3.51 U3.52 U3.53 U3.54 U3.55 U3.56 U3.57 U3.59 U3.60 U11.3 U11.11 X1.7 X1.9 X1.MH1 X1.MH2 X2.CH X2.RH
copper on no net: | length 18.8